# Altium PCB BlueCar.PcbDoc
Units mm, origin at the board's own origin, x right, y up, seen from the top; angles counter-clockwise.
Board outline 91.82 x 18.92 mm, 2 copper layers (Top Layer, Bottom Layer); 12 components, 14 nets, 74 pads, 18 vias.
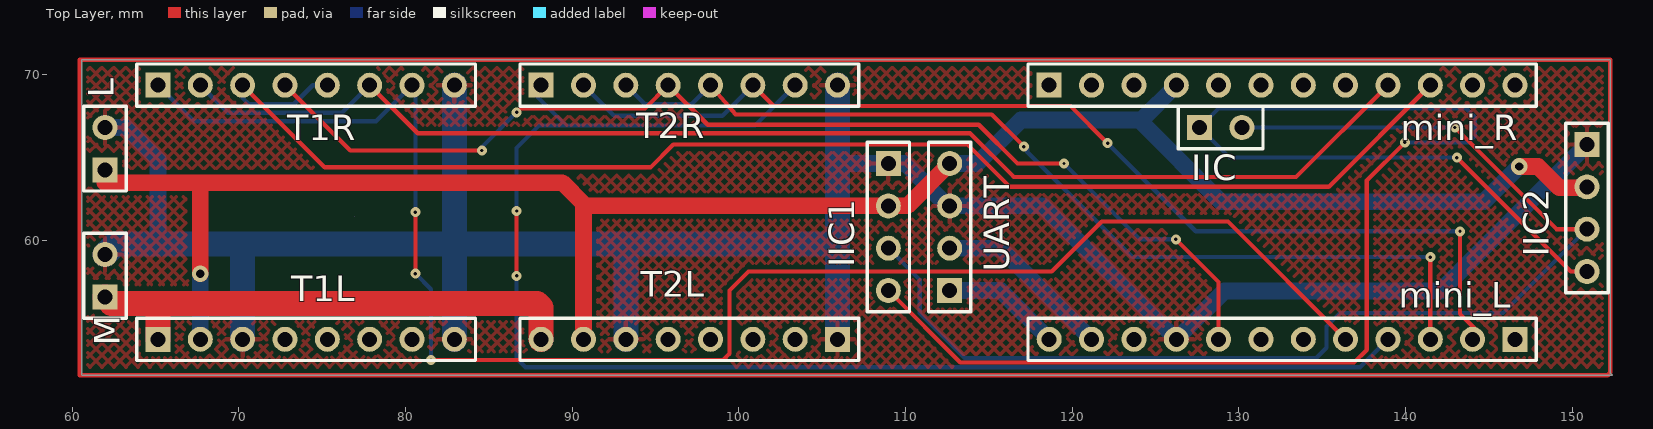
[diagram p0: Top Layer view]
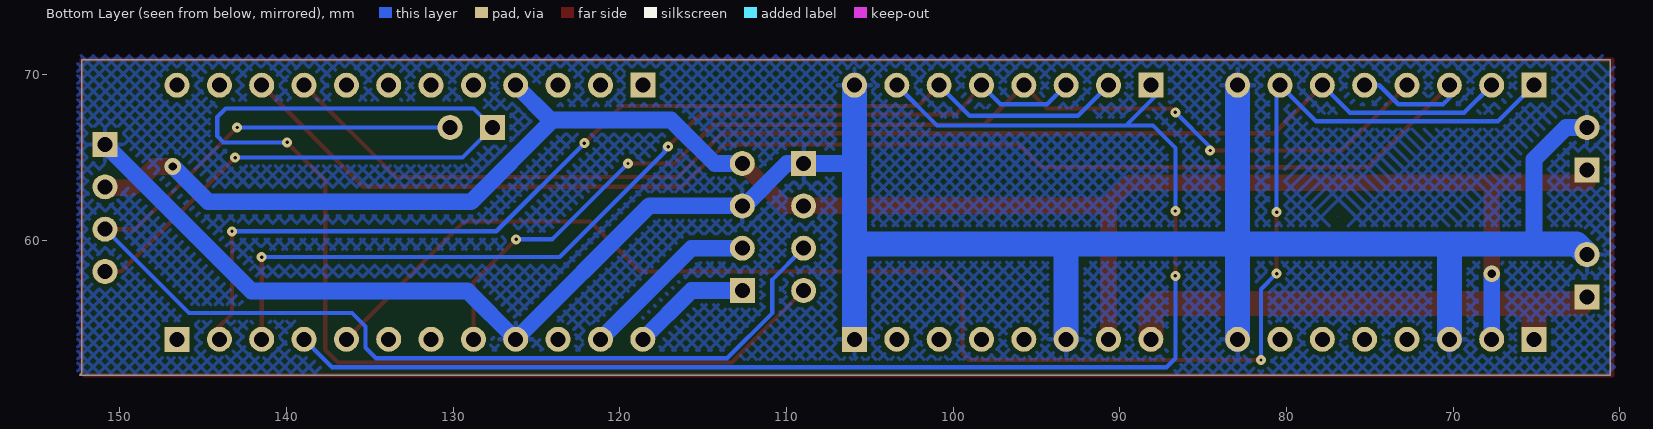
[diagram p1: Bottom Layer view, seen from below]

## Layer stack, top to bottom
Top Solder: solder mask 0.0102, Solder Resist, Dk 3.5
Top Layer: signal copper 0.0356
Dielectric 1: dielectric 0.32, FR-4, Dk 4.8
Bottom Layer: signal copper 0.0356
Bottom Solder: solder mask 0.0102, Solder Resist, Dk 3.5

## Board outline
60.579,70.866 60.579,51.943 152.4,51.943 152.273,52.07 152.273,70.866
cut-out: 60.579,70.866
cut-out: 76.962,61.468
cut-out: 60.579,70.866

## Design rules (kind name [scope] priority, off if disabled: settings)
Clearance [All] p1: gap=0.254 ignorepadtopadclearanceinfootprint=FALSE except(0: Arc-Hole Track-Hole SMDPad-Hole THPad-Hole Via-Hole Fill-Hole Poly-Hole Region-Hole Text-Hole)
PolygonConnect [All] p1: connectstyle=Relief reliefconductorwidth=0.254 reliefentries=4 polygonreliefangle="90 Angle" airgapwidth=0.254
RoomDefinition BlueCar [InComponentClass('BlueCar')] p1: confinementstyle=ConfineIn formatcopy=TRUE lockcomponents=FALSE outline 178.943,26.924 334.899,26.924 334.899,60.96 178.943,60.96
RoutingVias [All] p1: holewidth=0.711 width=1.27 viastyle="Through Hole" minholewidth=0.711 minwidth=1.27 maxholewidth=0.711 maxwidth=1.27
SolderMaskExpansion [All] p1: expansion=0.102
Width [All] p1: maxlimit=0.254 minlimit=0.254 preferedwidth=0.254
30 further rules are at their usual default settings.

## Classes and differential pairs
component class BlueCar: IIC IIC1 L M mini_R T1L T2L T2R

## Components (designator, comment, footprint, x,y, rotation, side; value= is the part's Value field where it differs from the comment)
IIC "Header 2" HDR1X2 127.635,66.802 r0 top
IIC1 "Header 4" HDR1X4 108.966,64.643 r270 top
IIC2 "Header 4" HDR1X4 150.876,65.786 r270 top
L "Header 2" HDR1X2 61.976,64.262 r90 top (schematic designator LOGIC_POWER)
M "Header 2" HDR1X2 61.976,56.642 r90 top (schematic designator MOTO_POWER)
mini_L "Header 12" HDR1X12 146.558,54.102 r180 top (schematic designator pro_mini_L)
mini_R "Header 12" HDR1X12 118.618,69.342 r0 top (schematic designator pro_mini_R)
T1L "Header 8" HDR1X8 65.151,54.102 r0 top (schematic designator TB6612_1_L)
T1R "Header 8" HDR1X8 65.151,69.342 r0 top (schematic designator TB6612_1_R)
T2L "Header 8" HDR1X8 105.918,54.102 r180 top (schematic designator TB6612_2_L)
T2R "Header 8" HDR1X8 88.138,69.342 r0 top (schematic designator TB6612_2_R)
UART "Header 4" HDR1X4 112.649,57.023 r90 top

## Footprints (in the part's own frame and the unit in brackets; to place one, negate y for a bottom-side part, rotate by r counter-clockwise, add the part's x,y. Pads: shape width x height; smd on the part's side, far side on the other; paste and mask are expansions set on the pad)
HDR1X2 [mm] "Connector; Header; 2 Position"
  rect 1.5x1.5 hole 0.9: 1(0,0)
  round 1.5 hole 0.9: 2(2.54,0)
  silkscreen extent -1.27,-1.27 3.81,1.27
HDR1X4 [mm] "Connector; Header; 4 Position"
  rect 1.5x1.5 hole 0.9: 1(0,0)
  round 1.5 hole 0.9: 2(2.54,0) 3(5.08,0) 4(7.62,0)
  silkscreen extent -1.27,-1.27 8.89,1.27
HDR1X8 [mm] "Connector; Header; 8 Position"
  rect 1.5x1.5 hole 0.9: 1(0,0)
  round 1.5 hole 0.9: 2(2.54,0) 3(5.08,0) 4(7.62,0) 5(10.16,0) 6(12.7,0) 7(15.24,0) 8(17.78,0)
  silkscreen extent -1.27,-1.27 19.05,1.27
HDR1X12 [mm] "Connector; Header; 12 Position"
  rect 1.5x1.5 hole 0.9: 1(0,0)
  round 1.5 hole 0.9: 2(2.54,0) 3(5.08,0) 4(7.62,0) 5(10.16,0) 6(12.7,0) 7(15.24,0) 8(17.78,0) 9(20.32,0) 10(22.86,0) 11(25.4,0) 12(27.94,0)
  silkscreen extent -1.27,-1.27 29.21,1.27

## Part data
IIC L M: "Header, 2-Pin", LatestRevisionDate=17-Jul-2002, LatestRevisionNote="Re-released for DXP Platform.", Publisher="Altium Limited"
IIC1 IIC2 UART: "Header, 4-Pin", LatestRevisionDate=17-Jul-2002, LatestRevisionNote="Re-released for DXP Platform.", Publisher="Altium Limited"
mini_L mini_R: "Header, 12-Pin", LatestRevisionDate=17-Jul-2002, LatestRevisionNote="Re-released for DXP Platform.", Publisher="Altium Limited"
T1L T1R T2L T2R: "Header, 8-Pin", LatestRevisionDate=17-Jul-2002, LatestRevisionNote="Re-released for DXP Platform.", Publisher="Altium Limited"

## Via types
v1: diameter 0.6, hole 0.2, Top Layer to Bottom Layer, 16 vias
v2: diameter 1, hole 0.5, Top Layer to Bottom Layer, 2 vias

## Nets (pads, with @x,y where several pads share a name; then routed paths per layer and width w, separated by ;. In a path a pad name is that pad's centre, name@x,y a point inside that pad or via, vN(x,y) a via of type N, cw(c..) or ccw(c..) an arc to the next point about the centre after c; other vN are vias at no path point)
NetIIC1_1: IIC1.1 IIC2.1 L.2 M.2 mini_L.9 T1L.3 T1L.8 T1R.8 T2L.1 T2L.6 T2R.8 UART.3 | length 149.8
  Bottom Layer w0.254: 105.791,59.817 105.918,59.817 ; UART.3@112.522,62.103 UART.3 UART.3@113.03,62.103
  Bottom Layer w1: L.2@61.976,66.675 L.2 61.976,67.056 62.093,66.978 62.123,66.958 62.357,66.802 63.246,66.802 65.151,64.897 65.151,59.817 ; 105.918,64.643 IIC1.1 109.982,64.643 UART.3@112.522,62.103 ; UART.3@113.03,62.103 118.237,62.103 mini_L.9 129.134,56.998 142.088,56.998 IIC2.1
  Bottom Layer w1.5: M.2 62.611,59.817 65.151,59.817 70.231,59.817 ; T1L.3 70.231,59.817 ; T1L.8 82.931,59.817 ; T1R.8 82.931,59.817 ; T2L.6 93.218,59.817 ; 105.791,59.817 93.218,59.817 ; T2L.1 105.918,59.817 105.918,64.643 T2R.8 ; 70.231,59.817 82.931,59.817 ; 82.931,59.817 93.218,59.817
NetIIC1_2: IIC1.2 IIC2.2 L.1 mini_R.4 T1L.2 T2L.7 UART.4 | length 115.7
  Top Layer w0.254: 90.678,62.23 90.805,62.103 ; IIC2.2@150.812,63.182 IIC2.2
  Top Layer w1: 61.976,63.5 67.691,63.5 ; v2(67.691,58.039) 67.691,63.5 ; T2L.7 90.678,62.23 89.408,63.5 67.691,63.5 ; 90.805,62.103 IIC1.2 110.109,62.103 UART.4 ; v2(146.812,64.465) 147.942,64.465 149.225,63.182 IIC2.2@150.812,63.182
  Bottom Layer w0.254: 124.079,67.183 124.155,67.259
  Bottom Layer w1: T1L.2 v2(67.691,58.039) ; UART.4 114.3,64.643 116.916,67.259 124.155,67.259 mini_R.4 ; 124.079,67.183 128.905,62.357 144.704,62.357 v2(146.812,64.465)
NetIIC1_3: IIC1.3 IIC2.3 IIC.2 | length 73
  Top Layer w0.254: v1(142.951,66.802) 149.047,60.706 IIC2.3
  Bottom Layer w0.254: IIC1.3 110.846,57.683 110.846,55.677 113.563,52.959 134.62,52.959 135.255,53.594 135.255,54.864 136.068,55.677 145.847,55.677 IIC2.3 ; IIC.2 v1(142.951,66.802)
NetIIC1_4: IIC1.4 IIC2.4 IIC.1 | length 93.7
  Top Layer w0.254: IIC1.4 113.284,52.705 136.906,52.705 137.668,53.467 137.668,63.627 v1(139.954,65.913) ; v1(143.069,64.999) 149.901,58.166 IIC2.4
  Bottom Layer w0.254: v1(139.954,65.913) 143.764,65.913 144.145,66.294 144.145,67.437 143.637,67.945 128.778,67.945 IIC.1 129.438,64.999 v1(143.069,64.999)
NetMOTO_POWER_1: M.1 T1L.1 T2L.8 | length 30.7
  Top Layer w0.254: T1L.1@65.024,54.229 T1L.1
  Top Layer w1.5: M.1 62.357,56.261 65.151,56.261 ; T1L.1 65.151,56.261 ; T2L.8 88.138,56.007 87.884,56.261 65.151,56.261
Netpro_mini_L_2: mini_L.2 T2R.2 T2R.6 | length 64.8
  Top Layer w0.254: T2R.6 102.089,68.091 119.894,68.091 v1(122.123,65.862) ; v1(143.256,60.579) 143.256,55.626 144.145,54.737 143.764,54.356 mini_L.2
  Bottom Layer w0.254: T2R.2 92.507,67.513 99.009,67.513 T2R.6 ; v1(122.123,65.862) 127.406,60.579 v1(143.256,60.579)
Netpro_mini_L_3: mini_L.3 T2R.3 T2R.5 | length 58.9
  Top Layer w0.254: T2R.5 99.803,67.583 115.17,67.583 v1(117.094,65.659) ; mini_L.3 141.224,54.356 141.478,54.61 v1(141.478,59.03)
  Bottom Layer w0.254: T2R.3 94.361,68.199 97.155,68.199 T2R.5 ; v1(117.094,65.659) 117.297,65.659 117.297,65.329 123.596,59.03 v1(141.478,59.03)
Netpro_mini_L_4: mini_L.4 T2R.1 T2R.7 | length 87.5
  Top Layer w0.254: v1(86.665,57.912) v1(86.665,61.798)
  Bottom Layer w0.254: v1(86.665,57.912) 86.665,52.959 87.198,52.426 137.262,52.426 mini_L.4 ; v1(86.665,61.798) 86.665,65.583 88.011,66.929 89.637,66.929 ; T2R.1 87.681,68.885 89.637,66.929 ; T2R.7 100.965,66.929 89.637,66.929
Netpro_mini_L_5: mini_L.5 T1R.1 T1R.7 | length 97.4
  Top Layer w0.254: v1(80.594,58.039) v1(80.594,61.722) ; v1(81.534,52.857) 99.06,52.857 99.441,53.238 99.441,57.023 100.584,58.166 118.77,58.166 121.768,61.163 129.337,61.163 mini_L.5
  Bottom Layer w0.254: T1R.1 67.31,67.183 78.232,67.183 T1R.7 80.594,69.139 v1(80.594,61.722) ; v1(80.594,58.039) 81.534,57.099 v1(81.534,52.857)
Netpro_mini_L_8: mini_L.8 T1R.4 T2R.4 | length 67.7
  Top Layer w0.254: T1R.4 76.683,65.43 v1(84.582,65.43) ; v1(86.665,67.716) 86.893,67.945 94.361,67.945 T2R.4 98.133,66.967 114.389,66.967 116.713,64.643 v1(119.507,64.643) ; v1(126.213,60.096) 128.778,57.531 mini_L.8
  Bottom Layer w0.254: v1(84.582,65.43) 84.582,65.634 v1(86.665,67.716) ; v1(119.507,64.643) 124.054,60.096 v1(126.213,60.096)
Netpro_mini_L_11: mini_L.11 UART.2 | length 10.8
  Bottom Layer w1: UART.2 115.697,59.563 mini_L.11
Netpro_mini_L_12: mini_L.12 UART.1 | length 7.2
  Bottom Layer w1: UART.1 114.3,57.023 115.697,57.023 mini_L.12
Netpro_mini_R_9: mini_R.9 T1R.2 T1R.6 | length 77.2
  Top Layer w0.254: T1R.6 80.734,66.459 113.865,66.459 116.494,63.83 133.426,63.83 mini_R.9
  Bottom Layer w0.254: T1R.2 69.342,67.691 76.2,67.691 T1R.6
Netpro_mini_R_10: mini_R.10 T1R.3 T1R.5 | length 83.9
  Top Layer w0.254: T1R.3 75.159,64.414 94.691,64.414 96.063,65.786 113.716,65.786 116.256,63.246 135.382,63.246 mini_R.10
  Bottom Layer w0.254: T1R.3 70.231,68.58 70.612,68.199 73.297,68.199 74.44,69.342 T1R.5
pads on no net: mini_L.1 mini_L.6 mini_L.7 mini_L.10 mini_R.1 mini_R.2 mini_R.3 mini_R.5 mini_R.6 mini_R.7 mini_R.8 mini_R.11 mini_R.12 T1L.4 T1L.5 T1L.6 T1L.7 T2L.2 T2L.3 T2L.4 T2L.5
copper on no net: | length 221.4
  Top Layer w0.254: 60.452,51.943 62.103,51.943 66.675,51.943 152.124,51.943 152.273,52.092 152.273,70.866 64.157,70.866 60.452,70.866 60.452,69.596 60.452,68.453 60.452,54.864 60.452,53.975 60.452,51.943

## Polygon pours and split planes (outlines as drawn)
NetIIC1_1 on Top Layer (hatched 45Degree grid 0.508 track 0.203, remove dead copper, pour order 12): 60.325,70.612 60.325,52.07 152.251,52.07 152.527,52.346 152.527,70.993 60.579,70.993 60.452,70.866
no net on Top Layer "Top Layer-No Net" (solid, pour order 4): 65.913,57.15
NetIIC1_1 on Bottom Layer (hatched 45Degree grid 0.508 track 0.203, remove dead copper, pour order 14): 60.579,70.866 152.527,70.866 152.527,52.07 152.4,51.943 152.273,52.07 60.325,52.07 60.325,70.612